# Altium PCB wireTest.PcbDoc
Units mm, origin at the board's own origin, x right, y up, seen from the top; angles counter-clockwise.
Board outline 125 x 132 mm, 2 copper layers (Top Layer, Bottom Layer); 46 components, 50 nets, 219 pads, 0 vias.
Unrouted connection lines stored in the file: 88.
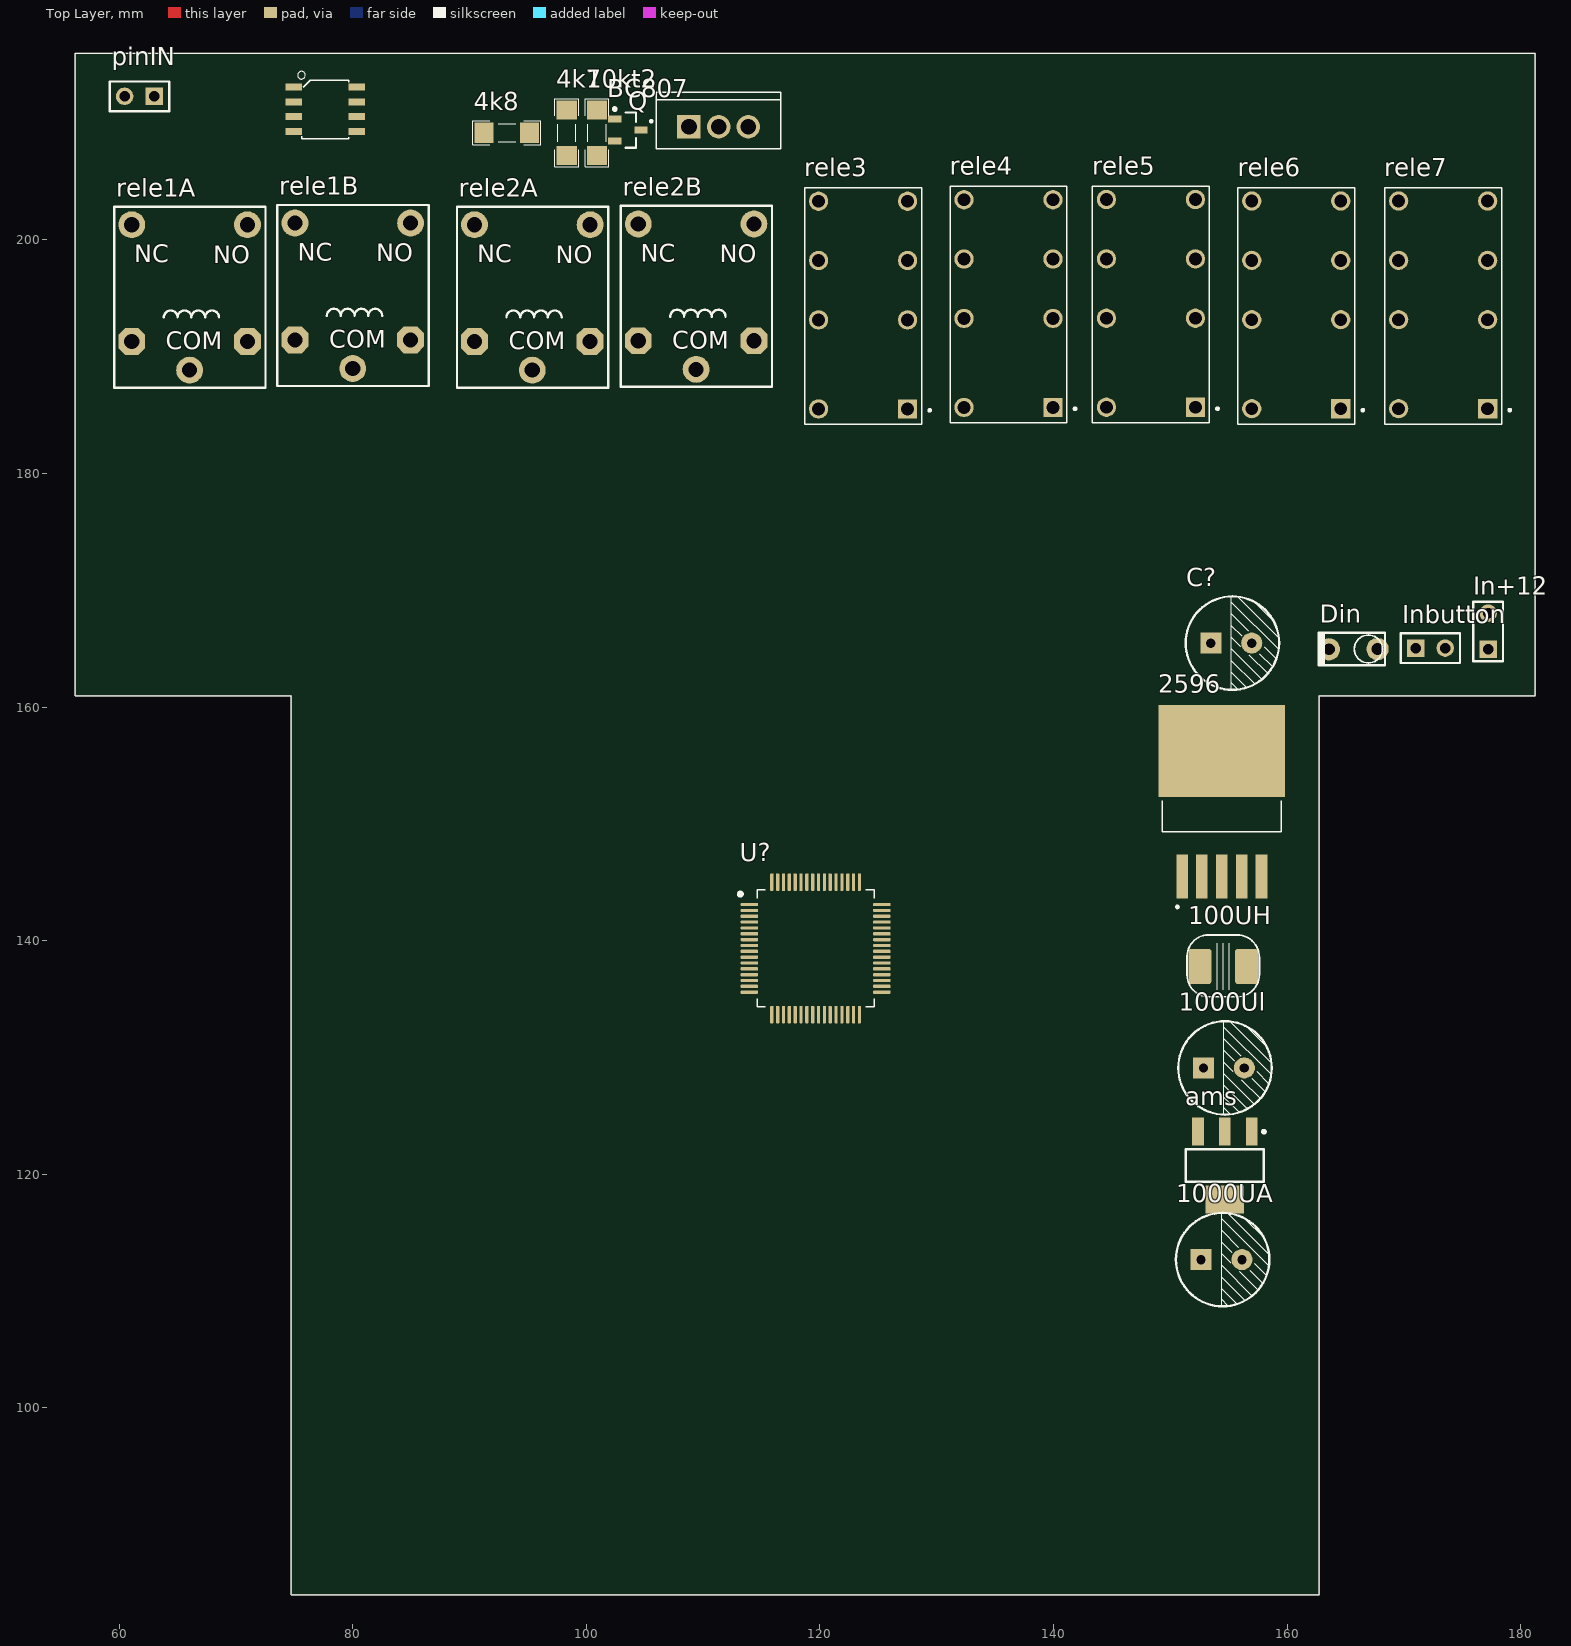
[diagram p0: Top Layer view]
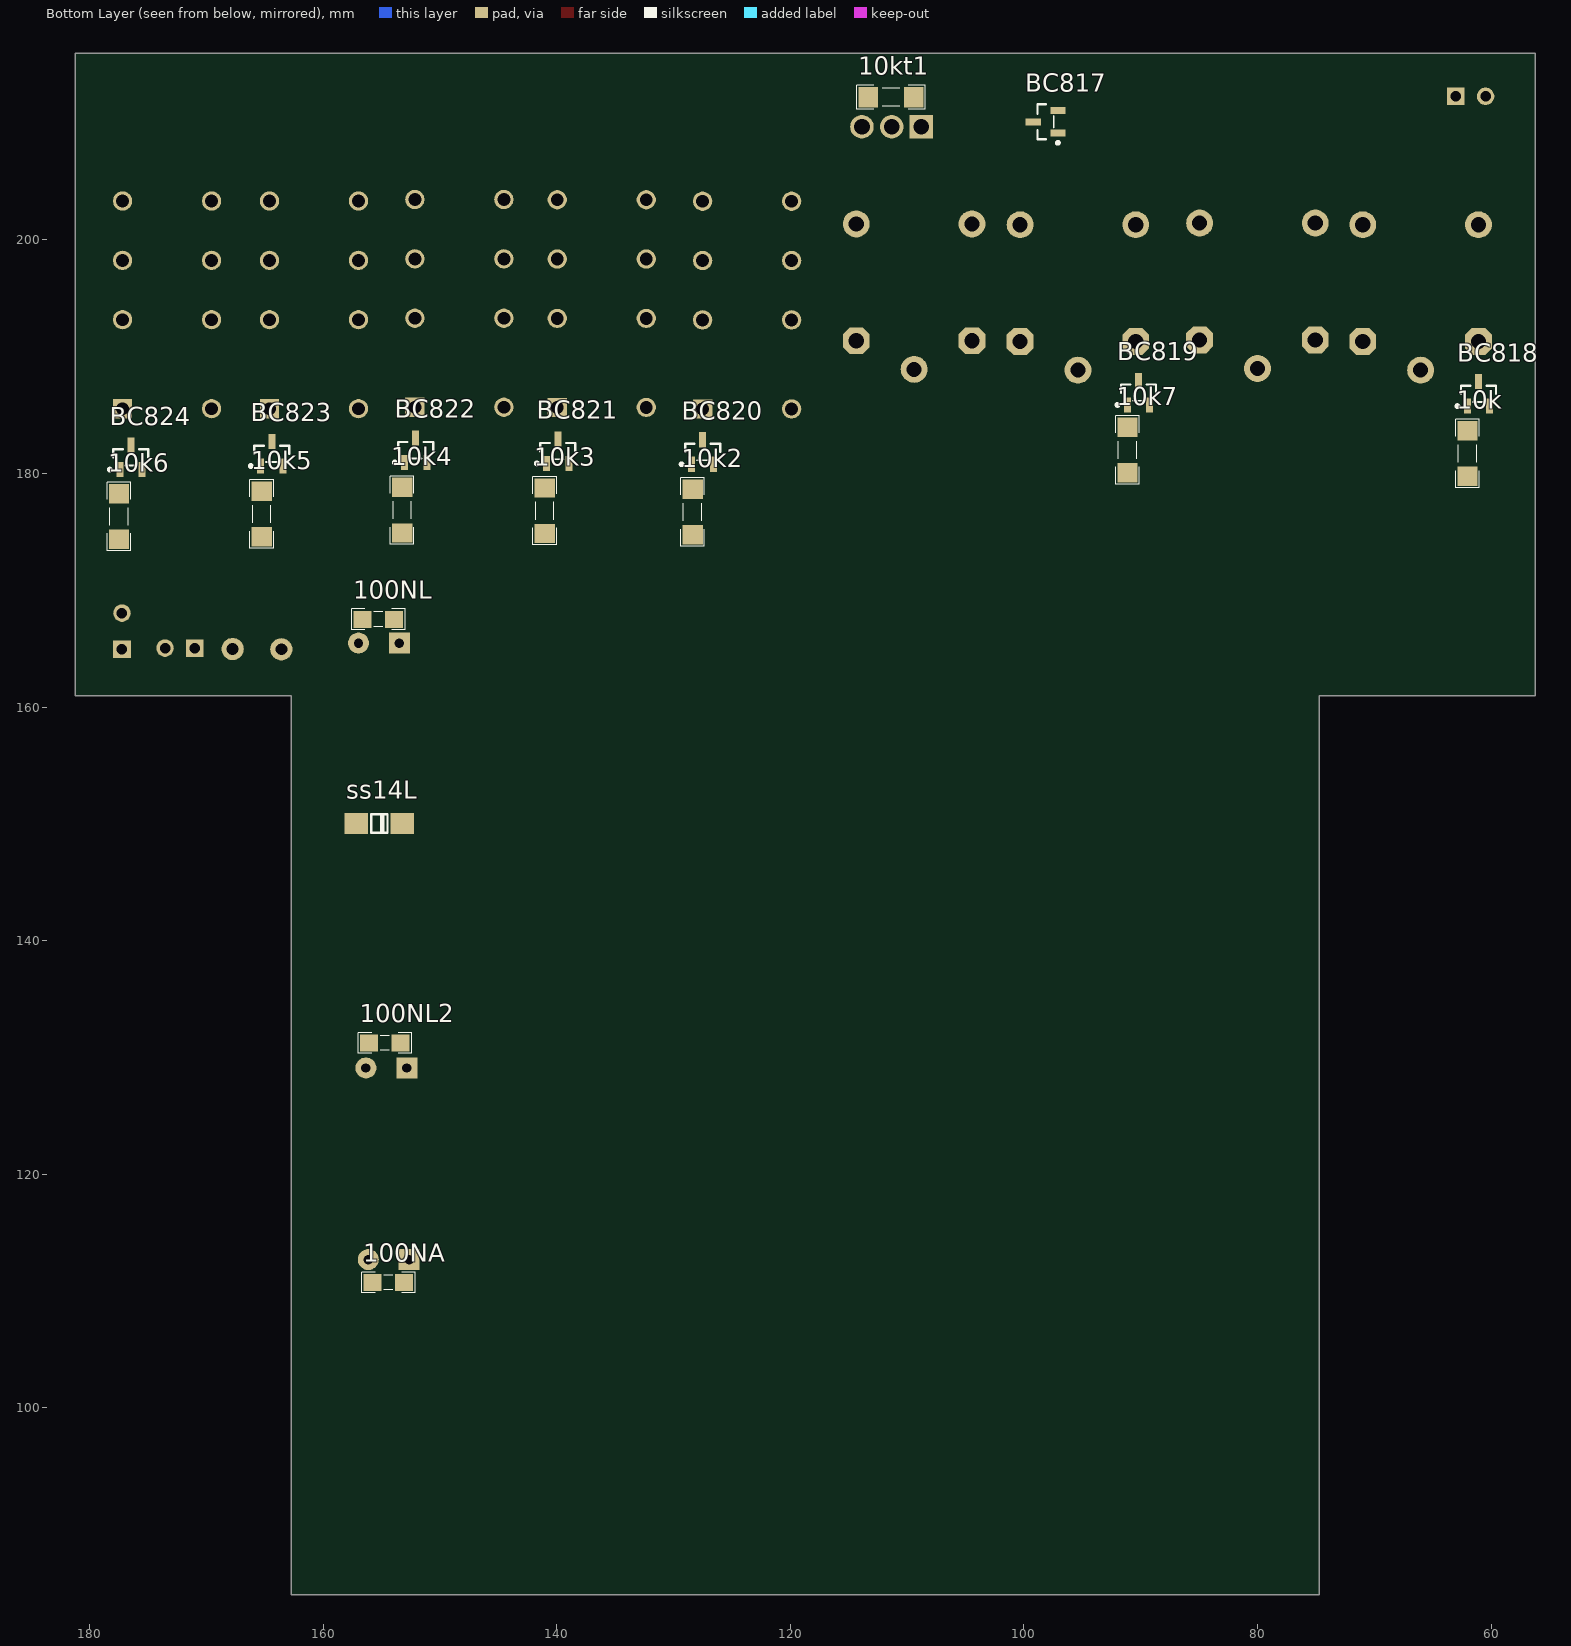
[diagram p1: Bottom Layer view, seen from below]

## Layer stack, top to bottom
Top Solder: solder mask 0.0102, Solder Resist, Dk 3.5
Top Layer: signal copper 0.0356
Dielectric 1: dielectric 0.32, FR-4, Dk 4.8
Bottom Layer: signal copper 0.0356
Bottom Solder: solder mask 0.0102, Solder Resist, Dk 3.5

## Board outline
56.233,160.992 56.233,215.992 181.234,215.992 181.234,160.992 162.733,160.992 162.733,83.992 74.734,83.992 74.734,160.992

## Design rules (kind name [scope] priority, off if disabled: settings)
Clearance [All] p1: gap=0.254 ignorepadtopadclearanceinfootprint=FALSE except(0: Arc-Hole Track-Hole SMDPad-Hole THPad-Hole Via-Hole Fill-Hole Poly-Hole Region-Hole Text-Hole)
PolygonConnect [All] p1: connectstyle=Relief reliefconductorwidth=0.254 reliefentries=4 polygonreliefangle="90 Angle" airgapwidth=0.254
RoutingVias [All] p1: holewidth=0.711 width=1.27 viastyle="Through Hole" minholewidth=0.711 minwidth=1.27 maxholewidth=0.711 maxwidth=1.27
SolderMaskExpansion [All] p1: expansion=0.102
Width [All] p1: maxlimit=0.254 minlimit=0.254 preferedwidth=0.254
30 further rules are at their usual default settings.

## Components (designator, comment, footprint, x,y, rotation, side; value= is the part's Value field where it differs from the comment)
4k7 "4k7" RESC4817X04N 98.323,209.169 r90 top
4k8 "4k7" RESC4817X04N 93.193,209.169 r180 top
10k "10k" RESC4817X04N 62.027,181.712 r270 bottom
10k2 "10k" RESC4817X04N 128.372,176.708 r270 bottom
10k3 "10k" RESC4817X04N 141.021,176.809 r270 bottom
10k4 "10k" RESC4817X04N 153.238,176.86 r270 bottom
10k5 "10k" RESC4817X04N 165.252,176.53 r270 bottom
10k6 "10k6" RESC4817X04N 177.47,176.327 r270 bottom
10k7 "10k" RESC4817X04N 91.135,182.016 r270 bottom
10kt1 "10k" RESC4817X04N 111.379,212.217 r180 bottom
10kt2 "10k" RESC4817X04N 100.914,209.169 r270 top
100NA "100NA" CAPC3413X12N 154.407,110.744 r180 bottom
100NL "100NL" CAPC3413X12N 155.27,167.513 r180 bottom
100NL2 "100NL2" CAPC3413X12N 154.711,131.242 r0 bottom
100UH "100UH" "Inductor SMD 3x3.2mm" 154.534,137.795 r0 top value=4µ7
1000UA "1000UA" "Cap electrolitic radial 8x12-3.5" 154.381,112.7 r0 top value=1uF
1000Ul "1000Ul" "Cap electrolitic radial 8x12-3.5" 154.584,129.108 r0 top value=1uF
2596 "2596" TO170P1524X483-6N 154.407,151.892 r90 top
ams "ams" MP04A_N 154.661,120.752 r270 top
BC807 "BC807" SOT23_BEC_N 103.556,209.398 r0 top
BC817 "BC817" SOT23_N 98.146,210.109 r0 bottom
BC818 "BC817" SOT23_N 61.087,186.817 r90 bottom
BC819 "BC817" SOT23_N 90.195,186.919 r90 bottom
BC820 "BC817" SOT23_N 127.508,181.839 r90 bottom
BC821 "BC817" SOT23_N 139.903,181.915 r90 bottom
BC822 "BC817" SOT23_N 152.07,181.991 r90 bottom
BC823 "BC817" SOT23_N 164.389,181.686 r90 bottom
BC824 "BC817" SOT23_N 176.454,181.381 r90 bottom
C? "1uF" "Cap electrolitic radial 8x12-3.5" 155.219,165.481 r0 top
Din "Din" "Diode 1W Stand" 165.684,164.973 r180 top
In+12 "in+12" HDR1X2#1 177.216,165.202 r90 top
Inbutton "Inbutton" HDR1X2#2 170.993,165.049 r0 top
pinIN "PinIN" HDR1X2#2 63.017,212.293 r180 top
Q "IRF3205PBF" TO254P1067X483X3124-3P 108.788,209.677 r0 top
rele1A "rele1A" "Relay 15.40x12.10x13.10" 66.04,188.849 r0 top
rele1B "rele1B" "Relay 15.40x12.10x13.10" 80.007,188.99 r0 top
rele2A "rele2A" "Relay 15.40x12.10x13.10" 95.377,188.849 r0 top
rele2B "rele2B" "Relay 15.40x12.10x13.10" 109.401,188.914 r0 top
rele3 "rele3" RELAY_9-1393792-3 123.698,194.31 r90 top
rele4 "rele4" RELAY_9-1393792-3 136.144,194.437 r90 top
rele5 "rele5" RELAY_9-1393792-3 148.336,194.454 r90 top
rele6 "rele6" RELAY_9-1393792-3 160.782,194.327 r90 top
rele7 "rele7" RELAY_9-1393792-3 173.355,194.327 r90 top
ss14L "ss14L" "Diode 1N4007 SMD" 157.158,150.038 r180 bottom
U? "STM32F103RET6" QFP50P1200X1200X160-64N 119.634,139.344 r0 top
? "CURRENT-ACS712ELCTR-05B-T(SOIC8-5X4MM)" SOIC8-1.27-5X4MM 77.648,211.176 r270 top

## Footprints (in the part's own frame and the unit in brackets; to place one, negate y for a bottom-side part, rotate by r counter-clockwise, add the part's x,y. Pads: shape width x height; smd on the part's side, far side on the other; paste and mask are expansions set on the pad)
"Cap electrolitic radial 8x12-3.5" [mm] "Cap electrolitic radial 8x12-3.5-Design:Abbas Basereh"
  rect 1.8x1.8 hole 0.8: 1(-1.75,0)
  round 1.8 hole 0.8: 2(1.75,0)
  silkscreen extent -3.9,-4 4.1,4, body extent -4,-4 4,4, height 12.3
CAPC3413X12N [mm] "Chip Capacitor, 2-Leads, Body 3/40x1/30mm, IPC Medium Density-Design:Abbas Basereh"
  rect 1.55x1.45 smd: 1(-1.35,0) 2(1.35,0)
  silkscreen extent -2.29,-0.89 2.29,0.89, body extent -1,-0.63 1,0.63, height 0.78
"Diode 1N4007 SMD" [mm] "DO-214AC 1N4001-4007"
  rect 2x1.8 smd: 1(0,0) 2(3.92,0)
  silkscreen extent 1.27,-0.81 2.67,0.83, body extent -0.54,-1.36 4.46,1.34, height 2.16
"Diode 1W Stand" [mil]
  round 75 hole 40: 1(-81,0) 2(83,1)
  silkscreen extent -106,-55 118,55, body extent -103,-52 65,53, height 291
HDR1X2#1 [mm] "Connector; Header; 2 Position"
  rect 1.5x1.5 hole 0.9: 1(-0.229,0)
  round 1.5 hole 0.9: 2(2.845,0)
  silkscreen extent -1.27,-1.27 3.81,1.27
HDR1X2#2 [mm] "Connector; Header; 2 Position"
  rect 1.5x1.5 hole 0.9: 1(0,0)
  round 1.5 hole 0.9: 2(2.54,0)
  silkscreen extent -1.27,-1.27 3.81,1.27
"Inductor SMD 3x3.2mm" [mm] "Inductor 4.7µH SMD 3x3.2mm"
  round 0.508 on Mech15: 0(0,0)
  rrect25% 2x3 smd: 1(-2,0) 2(2,0)
  silkscreen extent -3.1,-2.6 3.1,2.7, body extent -2.9,-2.6 2.89,2.6, height 4.5
MP04A_N [mm] "SOT223, 4-Leads, Body 6.5x3.5mm, Pitch 2.3mm, Lead Span 7mm, IPC Medium Density"
  rect 2.4x1 smd: 1(-2.9,2.3) 2(-2.9,0) 3(-2.9,-2.3)
  rect 2.4x3.3 smd: 4(2.9,0)
  silkscreen extent -3.02,-3.35 1.4,3.48, body extent -3.49,-3.24 3.49,3.24, height 1.64
QFP50P1200X1200X160-64N [mm]
  rrect50% 1.49x0.28 smd: 1(-5.67,3.75) 2(-5.67,3.25) 3(-5.67,2.75) 4(-5.67,2.25) 5(-5.67,1.75) 6(-5.67,1.25) 7(-5.67,0.75) 8(-5.67,0.25) 9(-5.67,-0.25) 10(-5.67,-0.75) 11(-5.67,-1.25) 12(-5.67,-1.75) 13(-5.67,-2.25) 14(-5.67,-2.75) 15(-5.67,-3.25) 16(-5.67,-3.75) 33(5.67,-3.75) 34(5.67,-3.25) 35(5.67,-2.75) 36(5.67,-2.25) 37(5.67,-1.75) 38(5.67,-1.25) 39(5.67,-0.75) 40(5.67,-0.25) 41(5.67,0.25) 42(5.67,0.75) 43(5.67,1.25) 44(5.67,1.75) 45(5.67,2.25) 46(5.67,2.75) 47(5.67,3.25) 48(5.67,3.75)
  rrect50% 0.28x1.49 smd: 17(-3.75,-5.67) 18(-3.25,-5.67) 19(-2.75,-5.67) 20(-2.25,-5.67) 21(-1.75,-5.67) 22(-1.25,-5.67) 23(-0.75,-5.67) 24(-0.25,-5.67) 25(0.25,-5.67) 26(0.75,-5.67) 27(1.25,-5.67) 28(1.75,-5.67) 29(2.25,-5.67) 30(2.75,-5.67) 31(3.25,-5.67) 32(3.75,-5.67) 49(3.75,5.67) 50(3.25,5.67) 51(2.75,5.67) 52(2.25,5.67) 53(1.75,5.67) 54(1.25,5.67) 55(0.75,5.67) 56(0.25,5.67) 57(-0.25,5.67) 58(-0.75,5.67) 59(-1.25,5.67) 60(-1.75,5.67) 61(-2.25,5.67) 62(-2.75,5.67) 63(-3.25,5.67) 64(-3.75,5.67)
  silkscreen extent -6.6,-5 5,5, body extent -6,-6 6,6, height 1.6
"Relay 15.40x12.10x13.10" [mm]
  round 2.3 hole 1.3: 1(0,0) 2(-4.95,12.45) 3(4.95,12.45)
  oct 2.3x2.3 hole 1.3: 4(-4.95,2.45) 5(4.95,2.45)
  silkscreen extent -6.45,-1.5 6.5,14, body extent -6.05,-1.3 6.05,14, height 16.1
RELAY_9-1393792-3 [mm]
  rect 1.65x1.65 / inner round 1.65 / far side rect 1.65x1.65 hole 1.1: 1(-8.78,-3.81)
  round 1.65 hole 1.1: 4(-1.16,-3.81) 6(3.92,-3.81) 8(9,-3.81) 9(9,3.81) 11(3.92,3.81) 13(-1.16,3.81) 16(-8.78,3.81)
  silkscreen extent -10.1,-5.8 10.14,5, body extent -10.1,-5 10.1,5, height 10.9
RESC4817X04N [mm] "Chip Resistor, 2-Leads, Body 4/80x1/70mm, IPC Medium Density-Design:Abbas Basereh"
  rect 1.65x1.75 smd: 1(-1.95,0) 2(1.95,0)
  silkscreen extent -2.92,-1.02 2.92,1.02, body extent -1.6,-0.8 1.6,0.8, height 1
SOIC8-1.27-5X4MM [mm]
  rect 0.6x1.4 smd: 1(-1.905,-2.7) 2(-0.635,-2.7) 3(0.635,-2.7) 4(1.905,-2.7) 5(1.905,2.7) 6(0.635,2.7) 7(-0.635,2.7) 8(-1.905,2.7)
  silkscreen extent -3.25,-2.36 2.5,2
SOT23_BEC_N [mm] "SOT23, 3-Leads, Body 2.9x1.3mm, Pitch 0.95mm, Lead Span 2.4mm, IPC Medium Density"
  rect 1.15x0.6 smd: 1(-1.125,0.95) 2(-1.125,-0.95) 3(1.125,0)
  silkscreen extent -1.25,-1.5 0.7,1.92, body extent -1.23,-1.45 1.07,1.45, height 1
SOT23_N [mm] "SOT23, 3-Leads, Body 2.9x1.3mm, Pitch 0.95mm, Lead Span 2.3mm, IPC Medium Density"
  rect 1.3x0.6 smd: 1(-1.05,0.95) 2(-1.05,-0.95) 3(1.05,0)
  silkscreen extent -1.17,-1.5 0.7,1.92, body extent -1.27,-1.5 1.27,1.5, height 1.1
TO170P1524X483-6N [mm]
  rect 3.79x0.99 smd: 1(-6.4,3.4) 2(-6.4,1.7) 3(-6.4,0) 4(-6.4,-1.7) 5(-6.4,-3.4)
  rect 7.88x10.84 smd paste-6: 6(4.35,0)
  silkscreen extent -9.1,-5.08 0.09,5.08
TO254P1067X483X3124-3P [mm]
  rect 2.01x2.01 hole 1.34: 1(0,0)
  round 2.01 hole 1.34: 2(2.54,0) 3(5.08,0)
  silkscreen extent -3.33,-1.87 7.88,2.96

## Part data
4k7 4k8 10k 10k2 10k3 10k4 10k5 10k6 10k7 10kt1 10kt2: library part "RES 1206 0.25W", "RES 1206", Data=16-12-2016, Desc.="RES SMD 1206", Designer="Abbas Basereh"
100NA 100NL 100NL2: library part "CAP SMD 0805", "CAP 0805", Data=16-12-2016, Desc.="CAP SMD 0805", Designer="Abbas Basereh"
100UH: library part "Inductor 4.7µH SMD 3x3.2mm", "Inductor 4.7µH SMD 3x3.2mm", Operating Temperature="-40°C ~ 125°C", Tolerance=±20%, Package / Case="Inductor 4.7µH SMD 3x3.2mm", SCDType=source, Supplier 1=Digi-Key, Type="Ferrite Core"
1000UA 1000Ul C?: library part "Cap ELECTROLITIC TOTAL SIZE", "Cap electrolitic radial", Data=16-12-2016, Designer="Abbas Basereh"
2596: library part LM2596S-5.0, Package=None, Availability=Unavailable, MP=LM2596S-5.0, Price=None
ams: library part LM1117IMP-x.x, "x.x Volt, 800mA Low-Dropout Linear Regulator, 4-pin SOT-223", Manufacturer="National Semiconductor", PackageTopMarking=XYTT*N05B, PartNumber=LM1117IMP-3.3, PowerWise=N, Supplier Part Number 1=7614123, Code_IPC=SOT223-4, Code_JEDEC=TO-261-AA, ComponentLink1Description="LM1117 Datasheet", ComponentLink1URL=http://www.national.com/ds/LM/LM1117.pdf, ComponentLink2Description="LM1117 Web Page", ComponentLink2URL=http://www.national.com/pf/LM/LM1117.html, ComponentLink3Description="MP04A Package Page", ComponentLink3URL=http://www.national.com/packaging/folders/mp04a.html, CompType="LDO IC", DatasheetVersion=Apr-2006, PackageDescription="Molded SOT-223, 6.50 x 3.56 x 1.6mm Body, 4 Lead, 2.3mm Pitch", PackageReference=MP04A, PackageVersion="revB, Apr-2003", PinCount=4, Published=4-Dec-2008, Publisher="Altium Limited", RoHS=N, Supplier 1=Farnell
BC807: "PNP General-purpose Transistor", LatestRevisionDate=29-May-2009, LatestRevisionNote="IPC-7351 Footprint Added.", PackageDescription="3-Pin SOT-23 Package 0.95 mm Pitch, 2.4 mm Lead Span", PackageReference=SOT-23B, PackageVersion=Aug-1999, Published=8-Jun-2000, Publisher="Altium Limited"
BC817 BC818 BC819 BC820 BC821 BC822 BC823 BC824: "45 V, 500 mA NPN general-purpose transistors", ComponentLink1Description="Manufacturer Link", ComponentLink1URL=http://www.nxp.com/, ComponentLink2Description=Datasheet, ComponentLink2URL=http://www.nxp.com/, DatasheetVersion=2017, LatestRevisionDate=2017, LatestRevisionNote="IPC-7351 Footprint Added.", PackageDescription="3-Pin SOT-23 Package 0.95 mm Pitch, 2.3 mm Lead Span", PackageReference=SOT23, PackageVersion=2017-2-8, Published=2017-2-8, Publisher="Abbas Basereh"
Din ss14L: library part "Diode DIP Package", "Diode DIP Package", Code_JEDEC=DO-204-AH, ComponentLink1Description="Manufacturer Link", ComponentLink1URL=http://www.fairchildsemi.com/, ComponentLink2Description=Datasheet, ComponentLink2URL=http://www.fairchildsemi.com/ds/1N%2F1N4148.pdf, DatasheetVersion=1997, LatestRevisionDate=17-Jul-2002, LatestRevisionNote="Re-released for DXP Platform.", PackageDescription="Diode, Axial; Body 3.8 x 1.9 mm (LxDia. max), Lead Dia. 0.53 mm (max)", Published=8-Jun-2000, Publisher="Altium Limited"
In+12 Inbutton pinIN: library part "Header 2", "Header, 2-Pin", LatestRevisionDate=17-Jul-2002, LatestRevisionNote="Re-released for DXP Platform.", Publisher="Altium Limited"
Q: "N-Channel 55V 110A _Tc_ 200W _Tc_ Through Hole TO-220AB", Package="TO-220 International Rectifier", Availability=Unavailable, MF="Infineon Technologies", MP=IRF3205PBF, Price=None, SnapEDA_Link=https://www.snapeda.com/parts/IRF3205PBF/Infineon%20Technologies/view-part/98571/?ref=snap
rele1A rele1B rele2A rele2B: library part "RELAY General", "Relay_SPDT POWER NEEDLE", Company=E.P.I.L, Design_Date=2011/10/31, Designer="Ali Hafizi"
rele3 rele4 rele5 rele6 rele7: library part V23105A5301A201, "Industrial Control, Relays, I/O Modules, spdt, relay, Relays and Accessories", Package=None, Check_prices=https://www.snapeda.com/parts/V23105-A5301-A201/TE+Connectivity+Potter+%2526+Brumfield+Relays/view-part/?ref=eda, MF="TE Connectivity", MP=V23105-A5301-A201, SnapEDA_Link=https://www.snapeda.com/parts/V23105-A5301-A201/TE+Connectivity+Potter+%2526+Brumfield+Relays/view-part/?ref=snap
U?: "ARM® Cortex®-M3 STM32F1 Microcontroller IC 32-Bit 72MHz 512KB (512K x 8) FLASH 64-LQFP (10x10)", Package="LQFP-64 STMicroelectronics", Check_prices=https://www.snapeda.com/parts/STM32F103RET6/STMicroelectronics/view-part/?ref=eda, MF=STMicroelectronics, MP=STM32F103RET6, SnapEDA_Link=https://www.snapeda.com/parts/STM32F103RET6/STMicroelectronics/view-part/?ref=snap
?: "Current Sensor 5A 1 Channel Hall Effect, Open Loop Bidirectional 8-SOIC _0.154, 3.90mm Width_", Package="SOIC-8 Allegro MicroSystems LLC", Availability=Unavailable, MF=Allegro, MP=ACS712ELCTR-05B-T, Price=None, SnapEDA_Link=https://www.snapeda.com/parts/ACS712ELCTR-05B-T/Allegro%20Industries/view-part/217679/?ref=snap

## Nets (pads, with @x,y where several pads share a name; then routed paths per layer and width w, separated by ;. In a path a pad name is that pad's centre, name@x,y a point inside that pad or via, vN(x,y) a via of type N, cw(c..) or ccw(c..) an arc to the next point about the centre after c; other vN are vias at no path point)
+5v: 100NL2.1 100UH.2 1000Ul.1 2596.4 ams.3
+12in: 10kt2.2 100NL.2 2596.1 BC807.2 C?.1 Din.2 rele1A.5 rele1B.5 rele2A.3 rele2A.5 rele2B.5 rele3.16 rele4.16 rele5.16 rele6.16 rele7.16
GND: 10kt1.1 100NA.1 100NL2.2 100NL.1 1000UA.2 1000Ul.2 2596.3 2596.5 2596.6 ams.1 BC817.2 BC818.2 BC819.2 BC820.2 BC821.2 BC822.2 BC823.2 BC824.2 C?.2 In+12.2 Q.3 ss14L.1
Net4k7_1: 4k7.1 BC817.3
Net4k7_2: 4k7.2 10kt2.1 BC807.1
Net4k8_1: 4k8.1 BC817.1
Net10k2_1: 10k2.1 BC820.1
Net10k3_1: 10k3.1 BC821.1
Net10k4_1: 10k4.1 BC822.1
Net10k5_1: 10k5.1 BC823.1
Net10k6_1: 10k6.1 BC824.1
Net10k7_1: 10k7.1 BC819.1
Net10k_1: 10k.1 BC818.1
Net10kt1_2: 10kt1.2 BC807.3 Q.1
Net100UH_1: 100UH.1 2596.2 ss14L.2
Net_1: ?.1 ?.2 pinIN.1
Net_3: ?.3 ?.4 rele1A.1
NetBC818_3: BC818.3 rele1A.4 rele1B.4
NetBC819_3: BC819.3 rele2A.4 rele2B.4
NetBC820_3: BC820.3 rele3.1
NetBC821_3: BC821.3 rele4.1
NetBC822_3: BC822.3 rele5.1
NetBC823_3: BC823.3 rele6.1
NetBC824_3: BC824.3 rele7.1
NetDin_1: Din.1 Inbutton.1
NetIn+12_1: In+12.1 Inbutton.2
NetpinIN_2: pinIN.2 rele1B.1 rele2B.1
Netrele1A_2: rele1A.2 rele2A.1
Netrele1A_3: rele1A.3 rele1B.3
Netrele2A_2: rele2A.2 rele3.4
Netrele2B_2: rele2B.2 rele3.13
Netrele3_8: rele3.8 rele4.4
Netrele3_9: rele3.9 rele4.13
Netrele4_8: rele4.8 rele5.4
Netrele4_9: rele4.9 rele5.13
Netrele5_8: rele5.8 rele6.4
Netrele5_9: rele5.9 rele6.13
Netrele6_8: rele6.8 rele7.4
Netrele6_9: rele6.9 rele7.13
outSelonoeid: Q.2 rele2B.3
pb6: 4k8.2
pc5: 10k6.2
pc8: 10k2.2
pc9: 10k3.2
pc10: 10k4.2
pc11: 10k5.2
pc12: 10k7.2
pc13: 10k.2
VCC: 100NA.2 1000UA.1 ams.2 ams.4
"": 
pads on no net: 100UH.0 ?.5 ?.6 ?.7 ?.8 rele1B.2 rele3.6 rele3.11 rele4.6 rele4.11 rele5.6 rele5.11 rele6.6 rele6.11 rele7.6 rele7.8 rele7.9 rele7.11 U?.1 U?.2 U?.3 U?.4 U?.5 U?.6 U?.7 U?.8 U?.9 U?.10 U?.11 U?.12 U?.13 U?.14 U?.15 U?.16 U?.17 U?.18 U?.19 U?.20 U?.21 U?.22 U?.23 U?.24 U?.25 U?.26 U?.27 U?.28 U?.29 U?.30 U?.31 U?.32 U?.33 U?.34 U?.35 U?.36 U?.37 U?.38 U?.39 U?.40 U?.41 U?.42 U?.43 U?.44 U?.45 U?.46 U?.47 U?.48 U?.49 U?.50 U?.51 U?.52 U?.53 U?.54 U?.55 U?.56 U?.57 U?.58 U?.59 U?.60 U?.61 U?.62 U?.63 U?.64

## Silkscreen, mask and mechanical layers (free items; w line width, h text height)
Top Overlay:
  the board outline again, w0.013

## Text inside footprints (layer, text, board x,y; h text height)
rele1A: Top Overlay "NC" at 61.316,198.069 h1.5; Top Overlay "NO" at 68.047,198.018 h1.5; Top Overlay "COM" at 64.008,190.627 h1.5
rele1B: Top Overlay "NC" at 75.283,198.21 h1.5; Top Overlay "NO" at 82.014,198.159 h1.5; Top Overlay "COM" at 77.975,190.768 h1.5
rele2A: Top Overlay "NC" at 90.653,198.069 h1.5; Top Overlay "NO" at 97.384,198.018 h1.5; Top Overlay "COM" at 93.345,190.627 h1.5
rele2B: Top Overlay "NC" at 104.676,198.134 h1.5; Top Overlay "NO" at 111.407,198.083 h1.5; Top Overlay "COM" at 107.369,190.692 h1.5